# EAGLE board Main (EAGLE 9.6.2)
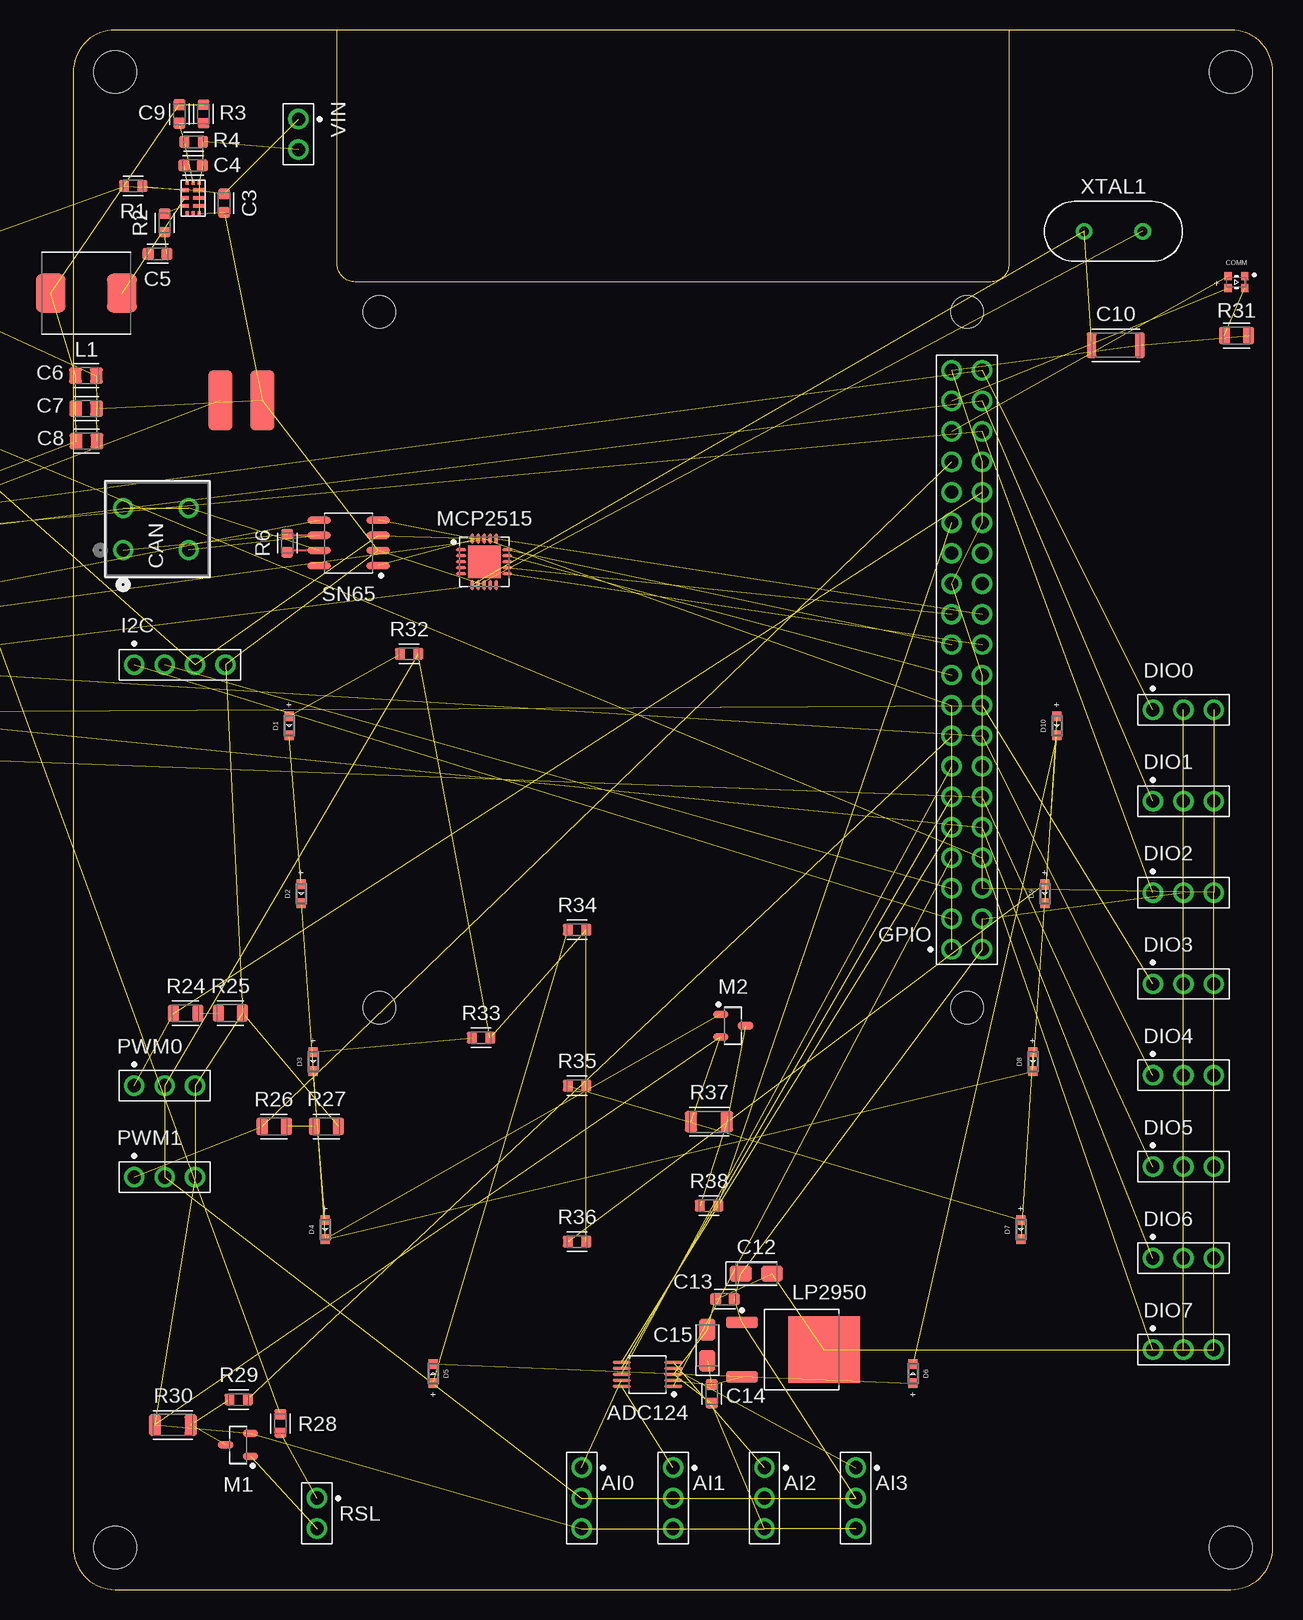
[diagram p0: board, top side]
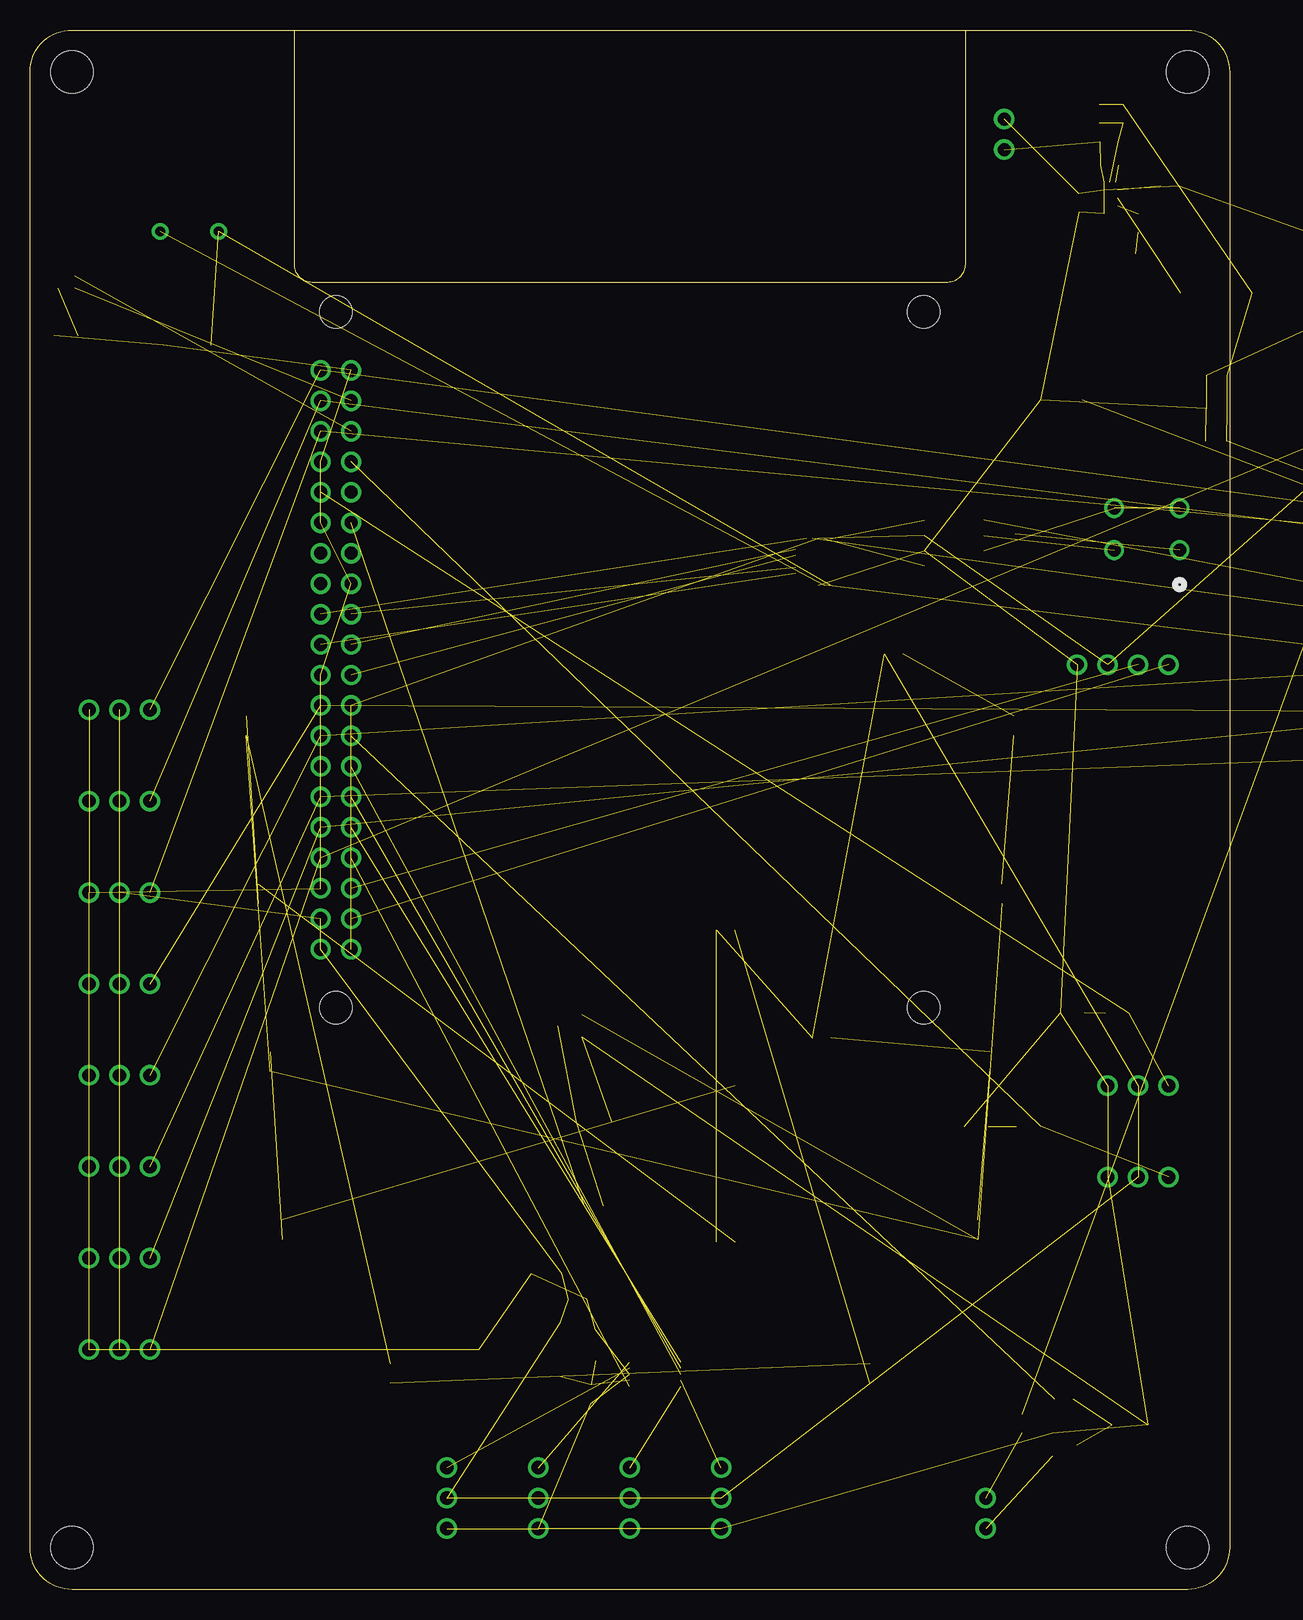
[diagram p1: board, bottom side, seen from below]

Size 100 x 130 mm. Coordinates in mm from the lower left corner, seen from the top.
Outline: 78,130 22,130
Outline: 78,130 78,110.5 arc-90 76.5,109 23.5,109 arc-90 22,110.5 22,130
Outline: 22,130 3.5,130 arc90 0,126.5 0,3.5 arc90 3.5,0 96.5,0 arc90 100,3.5 100,126.5 arc90 96.5,130 78,130
Copper layers (1+2*15+16): Top 0.035mm / dielectric 0.2mm / Route2 0.0175mm / dielectric 1.065mm / Route15 0.0175mm / dielectric 0.2mm / Bottom 0.035mm
Design rules "default *": minimum track width 6mil, minimum drill 0.35mm, track to track 6mil, track to pad 6mil, pad to pad 6mil, via to via 6mil, smd to smd 6mil, copper to edge 40mil, drill to drill 6mil, minimum pad ring 10mil, minimum via ring 8mil, stop-mask expansion 4mil, vias tented up to drill 0mil, thermal gap 10mil
Holes 3.55 mm at 96.5,126.5 3.5,126.5 3.5,3.5 96.5,3.5
Holes 2.7 mm at 25.5,48.5 74.5,48.5 25.5,106.5 74.5,106.5

## Footprints (pad centres in the part's own frame; a part is rotated, then mirrored left to right if it is on the bottom)
SOP50P490X110-10N = smd 1.471 x 0.28: 1 -2.15,1; 2 -2.15,0.5; 3 -2.15,0; 4 -2.15,-0.5; 5 -2.15,-1; 6 2.15,-1; 7 2.15,-0.5; 8 2.15,0; 9 2.15,0.5; 10 2.15,1
HDRV3W64P254_1X3_762X254X838B = drill 1.105 pad 1.705: 1 0,0; 2 2.54,0; 3 5.08,0
CAPC1912X140N = smd 1.081 x 1.379: 1 -0.87,0; 2 0.87,0
CAPC1608X90N = smd 0.921 x 0.98: 1 -0.775,0; 2 0.775,0
CAPC4020X56N = smd 0.798 x 2.112: 1 -2.007,0; 2 2.007,0
CAPMP3216X180N = smd 1.815 x 1.315: 1 -1.3,0; 2 1.3,0
CONN_1870640000_WED = drill 1.092 pad 1.6: 1 0,0; 2 0,-5.461; 3 3.505,0; 4 3.505,-5.461
WL-SBCC_0603 = smd 0.6 x 0.7: 1 -0.7,-0.5; 2 -0.7,0.5; 3 0.7,0.5; 4 0.7,-0.5
WL-SMCD_0603 = smd 0.8 x 0.75: 1 -0.8,0; 2 0.8,0
FUSC3216X117N = smd 1.175 x 1.815: 1 -1.47,0; 2 1.47,0
HDRVR40W64P254_2X20_5080X508X850B = drill 1.105 pad 1.705: 1 -24.13,1.27; 2 -21.59,1.27; 3 -19.05,1.27; 4 -16.51,1.27; 5 -13.97,1.27; 6 -11.43,1.27; 7 -8.89,1.27; 8 -6.35,1.27; 9 -3.81,1.27; 10 -1.27,1.27; 11 1.27,1.27; 12 3.81,1.27; 13 6.35,1.27; 14 8.89,1.27; 15 11.43,1.27; 16 13.97,1.27; 17 16.51,1.27; 18 19.05,1.27; 19 21.59,1.27; 20 24.13,1.27; 21 24.13,-1.27; 22 21.59,-1.27; 23 19.05,-1.27; 24 16.51,-1.27; 25 13.97,-1.27; 26 11.43,-1.27; 27 8.89,-1.27; 28 6.35,-1.27; 29 3.81,-1.27; 30 1.27,-1.27; 31 -1.27,-1.27; 32 -3.81,-1.27; 33 -6.35,-1.27; 34 -8.89,-1.27; 35 -11.43,-1.27; 36 -13.97,-1.27; 37 -16.51,-1.27; 38 -19.05,-1.27; 39 -21.59,-1.27; 40 -24.13,-1.27
HDRV4W64P254_1X4_1016X254X838B = drill 1.105 pad 1.705: 1 0,0; 2 2.54,0; 3 5.08,0; 4 7.62,0
INDM7166X300N = smd 2.476 x 3.21: 1 -2.967,0; 2 2.967,0
TO229P990X238-3N = smd 2.634 x 0.973: 1 -4.241,2.29; 2 -4.241,-2.29 | smd 5.934 x 5.527: 3 2.591,0
SOT95P240X100-3N = smd 1.259 x 0.608: 1 -1.028,0.95; 2 -1.028,-0.95; 3 1.028,0
QFN50P400X400X90-21T270N = smd 0.86 x 0.264: 1 -1.935,1; 2 -1.935,0.5; 3 -1.935,0; 4 -1.935,-0.5; 5 -1.935,-1; 11 1.935,-1; 12 1.935,-0.5; 13 1.935,0; 14 1.935,0.5; 15 1.935,1 | smd 0.264 x 0.86: 6 -1,-1.935; 7 -0.5,-1.935; 8 0,-1.935; 9 0.5,-1.935; 10 1,-1.935; 16 1,1.935; 17 0.5,1.935; 18 0,1.935; 19 -0.5,1.935; 20 -1,1.935 | smd 2.7 x 2.7: 21 0,0
MP2238 = smd 0.6 x 0.3: 1 -0.7,0.65; 2 -0.7,0; 3 -0.7,-0.65 | smd 0.25 x 0.4: 4 -0.5,-1.3; 5 0,-1.3; 6 0.5,-1.3; 10 0.5,1.3; 11 0,1.3; 12 -0.5,1.3 | smd 1 x 0.3: 7 0.5,-0.65; 8 0.5,0; 9 0.5,0.65
RESC1508X45N = smd 0.858 x 0.979: 1 -0.765,0; 2 0.765,0
RESC3116X55N = smd 1 x 1.77: 1 -1.51,0 | smd 1.05 x 1.77: 2 1.485,0
RESC2012X45N = smd 0.9 x 1.42: 1 -1.01,0 | smd 0.921 x 1.42: 2 1,0
HDRV2W64P254_1X2_508X254X838B = drill 1.105 pad 1.705: 1 0,0; 2 2.54,0
SOIC127P599X175-8N = smd 1.967 x 0.599: 1 -2.469,1.905; 2 -2.469,0.635; 3 -2.469,-0.635; 4 -2.469,-1.905; 5 2.469,-1.905; 6 2.469,-0.635; 7 2.469,0.635; 8 2.469,1.905
USB-C_POWER_PAD = smd 2 x 5: GND 1.75,0; V+ -1.75,0
XTALRR488W60L1150T500H350B = drill 0.8 pad 1.4: 1 -2.44,0; 2 2.44,0

## Placement (x,y rotation side)
ADC124  ADC124S051  [SOP50P490X110-10N]  47.87,17.92 180 top
AI0  3X1_MALE_HEADER_PIN  [HDRV3W64P254_1X3_762X254X838B]  42.38,10.16 270 top
AI1  3X1_MALE_HEADER_PIN  [HDRV3W64P254_1X3_762X254X838B]  50,10.16 270 top
AI2  3X1_MALE_HEADER_PIN  [HDRV3W64P254_1X3_762X254X838B]  57.62,10.16 270 top
AI3  3X1_MALE_HEADER_PIN  [HDRV3W64P254_1X3_762X254X838B]  65.24,10.16 270 top
C1  22µ  [CAPC1912X140N]  -22.86,109.22 0 top  (outside the outline)
C2  22µ  [CAPC1912X140N]  -16.51,109.22 0 top  (outside the outline)
C3  1µ  [CAPC1608X90N]  12.58,115.57 270 top
C4  1µ  [CAPC1608X90N]  10,118.71 0 top
C5  0.1µ  [CAPC1608X90N]  7.02,111.35 180 top
C6  22µ  [CAPC1912X140N]  1.06,101.19 0 top
C7  22µ  [CAPC1912X140N]  1.07,98.44 0 top
C8  22µ  [CAPC1912X140N]  1.11,95.72 0 top
C9  220p  [CAPC1608X90N]  8.85,123 270 top
C10  22p  [CAPC4020X56N]  86.9,103.71 0 top
C11  22p  [CAPC4020X56N]  -53.18,72.71 0 top  (outside the outline)
C12  1µ  [CAPMP3216X180N]  56.95,26.33 0 top
C13  0.1µ  [CAPC1608X90N]  54.33,24.2 180 top
C14  0.1µ  [CAPC1608X90N]  53.22,16.3 270 top
C15  1µ  [CAPMP3216X180N]  52.87,20.36 90 top
CAN  1870640000  [CONN_1870640000_WED]  4.16,86.64 90 top
COMM  [WL-SBCC_0603]  96.97,108.98 180 top
D1  [WL-SMCD_0603]  18,72 90 top
D2  [WL-SMCD_0603]  19,58 90 top
D3  [WL-SMCD_0603]  20,44 90 top
D4  [WL-SMCD_0603]  21,30 90 top
D5  [WL-SMCD_0603]  30,18 270 top
D6  [WL-SMCD_0603]  70,18 270 top
D7  [WL-SMCD_0603]  79,30 90 top
D8  [WL-SMCD_0603]  80,44 90 top
D9  [WL-SMCD_0603]  81,58 90 top
D10  [WL-SMCD_0603]  82,72 90 top
DIO0  3X1_MALE_HEADER_PIN  [HDRV3W64P254_1X3_762X254X838B]  90,73.34 0 top
DIO1  3X1_MALE_HEADER_PIN  [HDRV3W64P254_1X3_762X254X838B]  90,65.72 0 top
DIO2  3X1_MALE_HEADER_PIN  [HDRV3W64P254_1X3_762X254X838B]  90,58.1 0 top
DIO3  3X1_MALE_HEADER_PIN  [HDRV3W64P254_1X3_762X254X838B]  90,50.48 0 top
DIO4  3X1_MALE_HEADER_PIN  [HDRV3W64P254_1X3_762X254X838B]  90,42.86 0 top
DIO5  3X1_MALE_HEADER_PIN  [HDRV3W64P254_1X3_762X254X838B]  90,35.24 0 top
DIO6  3X1_MALE_HEADER_PIN  [HDRV3W64P254_1X3_762X254X838B]  90,27.62 0 top
DIO7  3X1_MALE_HEADER_PIN  [HDRV3W64P254_1X3_762X254X838B]  90,20 0 top
F1  8A  [FUSC3216X117N]  -58.26,72.71 0 top  (outside the outline)
GPIO  2X20_FEMALE_HEADER_PINV1  [HDRVR40W64P254_2X20_5080X508X850B]  74.5,77.5 90 top
I2C  4X1_MALE_HEADER_PIN4X1_MALE_HEADER_PIN  [HDRV4W64P254_1X4_1016X254X838B]  5.08,77.1 0 top
L1  2.2µ  [INDM7166X300N]  1.09,108.06 180 top
LP2950  LP2950ACDT−5.0  [TO229P990X238-3N]  60,20 0 top
M1  MOSFET  [SOT95P240X100-3N]  13.74,12.05 180 top
M2  MOSFET  [SOT95P240X100-3N]  55,47 0 top
MCP2515  MCP2515-QFN  [QFN50P400X400X90-21T270N]  34.26,85.67 0 top
MP2238  MP2238  [MP2238]  10,116 0 top
PWM0  3X1_MALE_HEADER_PIN  [HDRV3W64P254_1X3_762X254X838B]  5.08,42 0 top
PWM1  3X1_MALE_HEADER_PIN  [HDRV3W64P254_1X3_762X254X838B]  5.08,34.38 0 top
R1  [RESC1508X45N]  5,117 180 top
R2  10  [RESC1508X45N]  7.62,113.92 90 top
R3  100k  [RESC1508X45N]  10.86,123 90 top
R4  13.7k  [RESC1508X45N]  10.04,120.68 180 top
R5  10k  [RESC3116X55N]  -74.77,72.71 0 top  (outside the outline)
R6  120  [RESC1508X45N]  17.84,87.22 90 top
R7  1k  [RESC3116X55N]  -63.34,72.71 0 top  (outside the outline)
R8  20k  [RESC2012X45N]  -69.69,81.6 0 top  (outside the outline)
R9  20k  [RESC2012X45N]  -74.77,81.6 0 top  (outside the outline)
R10  20k  [RESC2012X45N]  -79.85,72.71 0 top  (outside the outline)
R11  20k  [RESC2012X45N]  -64.61,81.6 0 top  (outside the outline)
R12  20k  [RESC2012X45N]  -79.85,81.6 0 top  (outside the outline)
R13  20k  [RESC2012X45N]  -84.93,81.6 0 top  (outside the outline)
R14  20k  [RESC2012X45N]  -86.2,72.71 0 top  (outside the outline)
R15  20k  [RESC2012X45N]  -92.55,72.71 0 top  (outside the outline)
R16  20k  [RESC2012X45N]  -90.01,81.6 0 top  (outside the outline)
R17  20k  [RESC2012X45N]  -95.09,81.6 0 top  (outside the outline)
R18  20k  [RESC2012X45N]  -98.9,72.71 0 top  (outside the outline)
R19  20k  [RESC2012X45N]  -105.25,72.71 0 top  (outside the outline)
R20  20k  [RESC2012X45N]  -100.17,81.6 0 top  (outside the outline)
R21  20k  [RESC2012X45N]  -105.25,81.6 0 top  (outside the outline)
R22  20k  [RESC2012X45N]  -16.51,101.6 0 top  (outside the outline)
R23  20k  [RESC2012X45N]  -22.86,101.6 0 top  (outside the outline)
R24  20k  [RESC2012X45N]  9.36,48.04 180 top
R25  20k  [RESC2012X45N]  13.1,48.06 180 top
R26  20k  [RESC2012X45N]  16.74,38.6 180 top
R27  20k  [RESC2012X45N]  21.09,38.6 180 top
R28  120  [RESC1508X45N]  17.27,13.84 90 top
R29  120  [RESC1508X45N]  13.79,15.84 0 top
R30  10k  [RESC3116X55N]  8.31,13.71 0 top
R31  165  [RESC2012X45N]  96.97,104.52 180 top
R32  49.9  [RESC1508X45N]  28,78 0 top
R33  49.9  [RESC1508X45N]  34,46 0 top
R34  49.9  [RESC1508X45N]  42,55 0 top
R35  49.9  [RESC1508X45N]  42,42 0 top
R36  49.9  [RESC1508X45N]  42,29 0 top
R37  10k  [RESC3116X55N]  53,39 0 top
R38  120  [RESC1508X45N]  53,32 0 top
RSL  2X1_MALE_HEADER_PIN  [HDRV2W64P254_1X2_508X254X838B]  20.32,7.62 270 top
SN65  SN65HVD230Q  [SOIC127P599X175-8N]  22.96,87.24 180 top
USB_PWR  USB-C_POWER_PAD  [USB-C_POWER_PAD]  14.01,99.13 0 top
VIN  2X1_MALE_HEADER_PIN  [HDRV2W64P254_1X2_508X254X838B]  18.78,122.57 270 top
XTAL1  8M  [XTALRR488W60L1150T500H350B]  86.71,113.21 0 top

## Library data of the parts
ADC124 AI0 AI1-AI3 C1-C15 DIO0 DIO1-DIO7 F1 GPIO I2C L1 LP2950 M1 M2 MCP2515 MP2238 PWM0 PWM1 R1-R38 RSL SN65 USB_PWR VIN XTAL1 = SamuelLibrary
CAN = SamuelLibrary; BUILT_BY: EMA_Colton; COPYRIGHT: Copyright (C) 2018 Accelerated Designs. All rights reserved; MANUFACTURER_PART_NUMBER: 1870640000; SOURCELIBRARY: Weidmuller_2019-05-22; VENDOR: Weidmuller
COMM = SamuelLibrary; ABSTRAHLWINKEL: 140°; CHIP-TECHNOLOGY: AlInGaP; DATASHEET-URL: https://www.we-online.com/catalog/datasheet/150060RV75240.pdf; EMITTING-COLOR: Red & Bright Green; I-V-R-TYP: 230mcd; I-V-V-TYP: 90mcd; LAMDA-DOM-R-TYP: 625nm; LAMDA-DOM-V-TYP: 570nm; LAMDA-PEAK-R-TYP: 630nm; LAMDA-PEAK-V-TYP: 572nm; PART-NUMBER: 150060RV75240; V-F-R-TYP: 2V; V-F-V-TYP: 2V
D1-D10 = SamuelLibrary; ABSTRAHLWINKEL: 140°; CHIP-TECHNOLOGY: AlInGaP; DATASHEET-URL: https://www.we-online.com/catalog/datasheet/150060VS55040.pdf; EMITTING-COLOR: Bright Green; I-V-TYP: 60mcd; LAMDA-DOM-TYP: 573nm; LAMDA-PEAK-TYP: 575nm; PART-NUMBER: 150060VS55040; V-F-TYP: 2V

## Nets
+3V3: GPIO.1 GPIO.9 I2C.3 MCP2515.18 R5.1 R8.1 R10.1 R12.1 R14.1 R16.1 R18.1 R20.1 R22.1 SN65.3
+5V: AI0.2 AI1.2 AI2.2 AI3.2 C12.1 C13.1 DIO0.2 DIO1.2 DIO2.2 DIO3.2 DIO4.2 DIO5.2 DIO6.2 DIO7.2 GPIO.39 GPIO.40 LP2950.1 PWM0.2 PWM1.2 R32.2 R33.2 R34.2 R35.2 R36.2
AI0: ADC124.9 AI0.1
AI1: ADC124.10 AI1.1
AI2: ADC124.5 AI2.1
AI3: ADC124.4 AI3.1
AN_CS: ADC124.1 GPIO.4
AN_DIN: ADC124.8 GPIO.7
AN_DOUT: ADC124.7 GPIO.6
AN_SCLK: ADC124.6 GPIO.5
CAN_RX: MCP2515.20 SN65.4
CAN_TX: MCP2515.19 SN65.1
CE0: GPIO.29 MCP2515.16
CE1: GPIO.28
COMM_GRN: COMM.4 GPIO.18
COMM_RED: COMM.3 GPIO.19
DIO0: DIO0.1 GPIO.21 R9.2
DIO1: DIO1.1 GPIO.22 R11.2
DIO2: DIO2.1 GPIO.23 R13.2
DIO3: DIO3.1 GPIO.32 R15.2
DIO4: DIO4.1 GPIO.33 R17.2
DIO5: DIO5.1 GPIO.35 R19.2
DIO6: DIO6.1 GPIO.36 R21.2
DIO7: DIO7.1 GPIO.37 R23.2
GND: ADC124.3 AI0.3 AI1.3 AI2.3 AI3.3 C1.2 C2.2 C3.2 C4.2 C6.2 C7.2 C8.2 C10.2 C11.2 C12.2 C13.2 C14.2 C15.2 DIO0.3 DIO1.3 DIO2.3 DIO3.3 DIO4.3 DIO5.3 DIO6.3 DIO7.3 GPIO.13 GPIO.20 GPIO.24 GPIO.26 GPIO.31 GPIO.34 GPIO.38 I2C.4 LP2950.3 M1.2 M2.2 MCP2515.8 MP2238.6 MP2238.10 PWM0.3 PWM1.3 R4.1 R7.2 R25.1 R27.1 R30.1 R31.1 R37.1 SN65.2 USB_PWR.GND VIN.2
N$1: M1.3 R29.1 R30.2
N$2: C4.1 MP2238.12
N$3: MP2238.3 R2.2
N$4: MP2238.1 R1.1
N$5: D1.1 D2.2
N$6: R8.2 R9.1
N$7: D1.2 R32.1
N$8: D3.1 D4.2
N$9: D3.2 R33.1
N$10: D5.1 D6.2
N$11: R12.2 R13.1
N$12: D5.2 R34.1
N$13: D7.1 D8.2
N$14: R16.2 R17.1
N$15: R20.2 R21.1
N$16: R10.2 R11.1
N$17: R14.2 R15.1
N$18: D7.2 R35.1
N$19: D9.1 D10.2
N$20: C10.1 MCP2515.6 XTAL1.1
N$21: R18.2 R19.1
N$22: D9.2 R36.1
N$23: M2.3 R37.2 R38.1
N$24: D2.1 D4.1 D6.1 D8.1 D10.1 M2.1
N$25: R22.2 R23.1
N$27: R24.1 R25.2
N$33: R26.1 R27.2
N$34: CAN.1 CAN.2 R6.2 SN65.6
N$35: CAN.3 CAN.4 R6.1 SN65.7
N$36: R7.1 SN65.5
N$38: ADC124.2 C14.1 C15.1 LP2950.2
N$40: GPIO.16
N$41: C11.1 MCP2515.7 XTAL1.2
N$45: C9.2 MP2238.11 R3.1 R4.2
N$47: C6.1 C7.1 C8.1 C9.1 F1.1 L1.2 R3.2
N$48: MCP2515.17 R5.2
N$49: C5.2 L1.1 MP2238.2
N$50: C5.1 R2.1
N$52: R28.1 RSL.1
N$53: M1.1 RSL.2
N$56: COMM.1 COMM.2 R31.2
PWM0: GPIO.25 PWM0.1 R24.2
PWM1: GPIO.17 PWM1.1 R26.2
PWR: GPIO.15 R38.2
RSL: GPIO.8 R29.2
SCL: GPIO.3 I2C.2
SDA: GPIO.2 I2C.1
SPI_MISO: GPIO.11 MCP2515.15
SPI_MOSI: GPIO.10 MCP2515.14
SPI_SCK: GPIO.12 MCP2515.12
V+: F1.2 USB_PWR.V+
VBATT+: C1.1 C2.1 C3.1 MP2238.9 R1.2 R28.2 VIN.1
~INT: GPIO.30 MCP2515.11

## Tracks (layer width: path | path; a pad name or v marks a point on that pad's centre or on a via)
+3V3  (13 unrouted)
+5V  (23 unrouted)
AI0  (1 unrouted)
AI1  (1 unrouted)
AI2  (1 unrouted)
AI3  (1 unrouted)
AN_CS  (1 unrouted)
AN_DIN  (1 unrouted)
AN_DOUT  (1 unrouted)
AN_SCLK  (1 unrouted)
CAN_RX  (1 unrouted)
CAN_TX  (1 unrouted)
CE0  (1 unrouted)
COMM_GRN  (1 unrouted)
COMM_RED  (1 unrouted)
DIO0  (2 unrouted)
DIO1  (2 unrouted)
DIO2  (2 unrouted)
DIO3  (2 unrouted)
DIO4  (2 unrouted)
DIO5  (2 unrouted)
DIO6  (2 unrouted)
DIO7  (2 unrouted)
GND  (51 unrouted)
N$1  (2 unrouted)
N$2  (1 unrouted)
N$3  (1 unrouted)
N$4  (1 unrouted)
N$5  (1 unrouted)
N$6  (1 unrouted)
N$7  (1 unrouted)
N$8  (1 unrouted)
N$9  (1 unrouted)
N$10  (1 unrouted)
N$11  (1 unrouted)
N$12  (1 unrouted)
N$13  (1 unrouted)
N$14  (1 unrouted)
N$15  (1 unrouted)
N$16  (1 unrouted)
N$17  (1 unrouted)
N$18  (1 unrouted)
N$19  (1 unrouted)
N$20  (2 unrouted)
N$21  (1 unrouted)
N$22  (1 unrouted)
N$23  (2 unrouted)
N$24  (5 unrouted)
N$25  (1 unrouted)
N$27  (1 unrouted)
N$33  (1 unrouted)
N$34  (2 unrouted)
  Top 0.152: R6.2 17.95,87.88 SN65.6
N$35  (2 unrouted)
  Top 0.152: SN65.7 17.69,86.61 R6.1 17.84,86.09
N$36  (1 unrouted)
N$38  (3 unrouted)
N$41  (2 unrouted)
N$45  (3 unrouted)
N$47  (6 unrouted)
N$48  (1 unrouted)
N$49  (2 unrouted)
N$50  (1 unrouted)
N$52  (1 unrouted)
N$53  (1 unrouted)
N$56  (1 unrouted)
  Top 0.152: COMM.1 COMM.2
PWM0  (2 unrouted)
PWM1  (2 unrouted)
PWR  (1 unrouted)
RSL  (1 unrouted)
SCL  (1 unrouted)
SDA  (1 unrouted)
SPI_MISO  (1 unrouted)
SPI_MOSI  (1 unrouted)
SPI_SCK  (1 unrouted)
V+  (1 unrouted)
VBATT+  (6 unrouted)
~INT  (1 unrouted)